# Altium PCB PCB.PcbDoc
Units mm, origin at the board's own origin, x right, y up, seen from the top; angles counter-clockwise.
Board outline 19.56 x 31 mm, 2 copper layers (Top Layer, Bottom Layer); 20 components, 8 nets, 40 pads, 0 vias.
Unrouted connection lines stored in the file: 1.
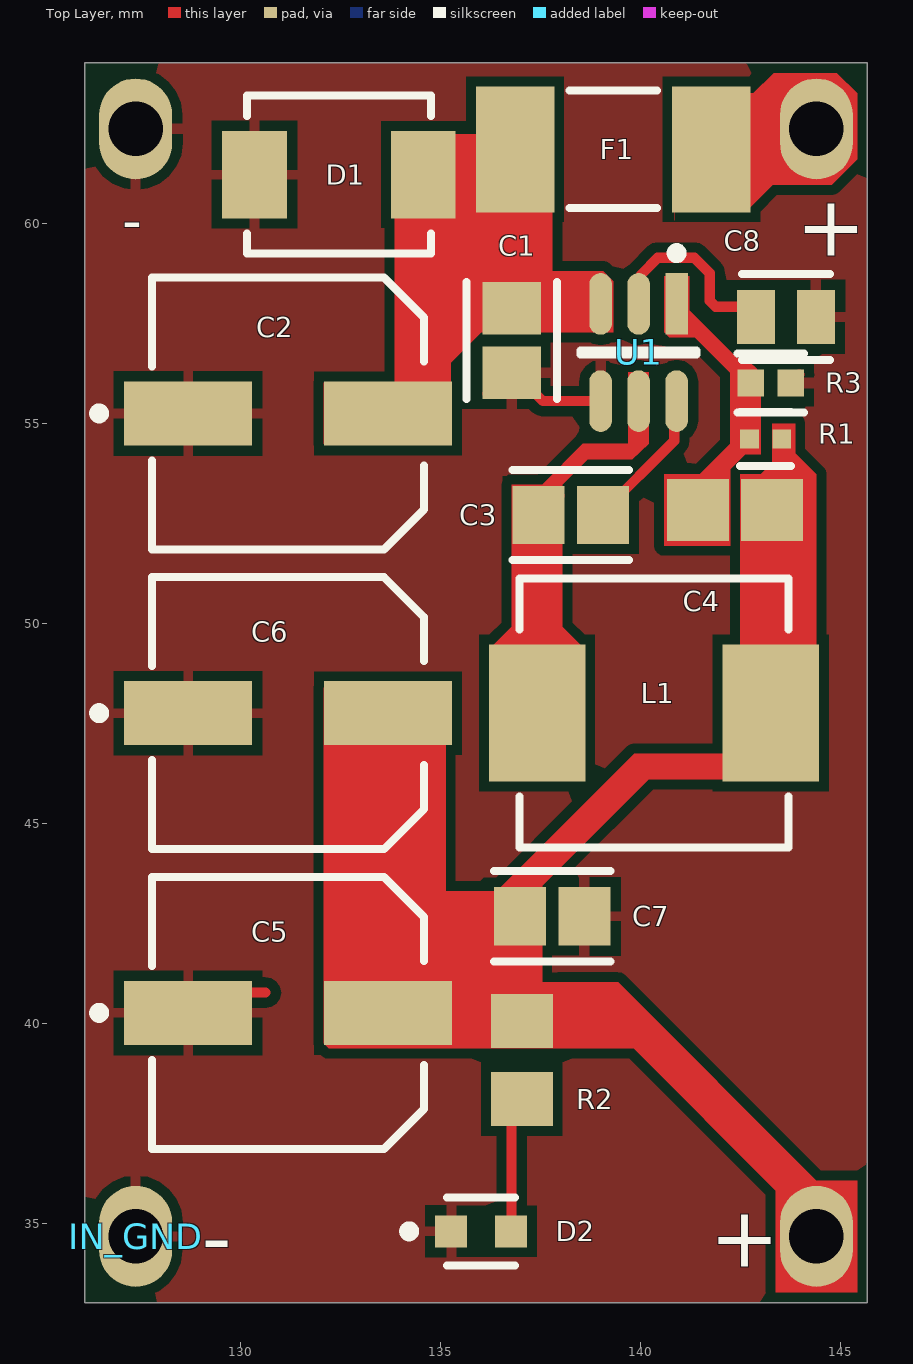
[diagram p0: Top Layer view]
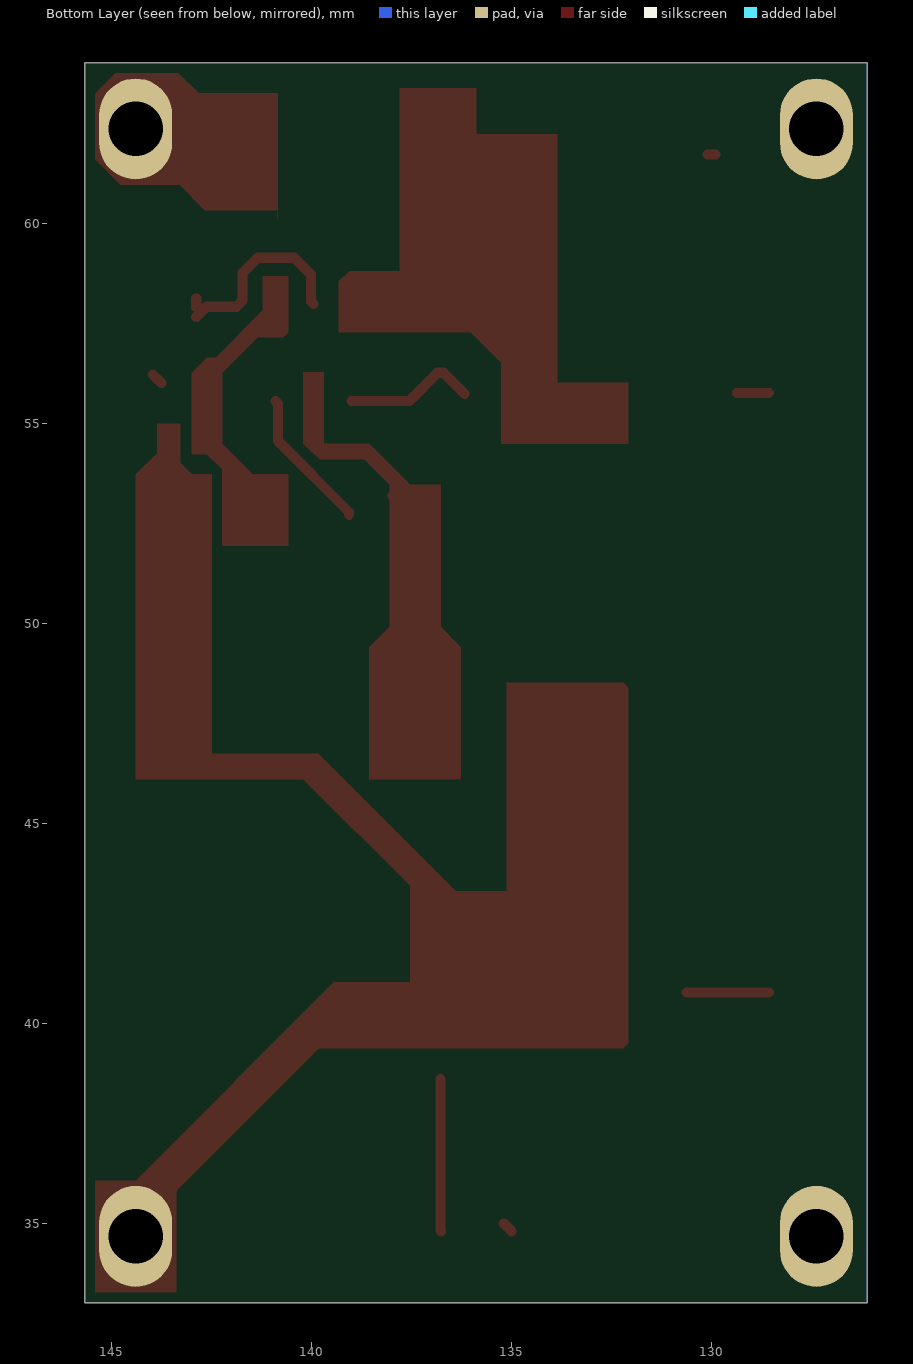
[diagram p1: Bottom Layer view, seen from below]
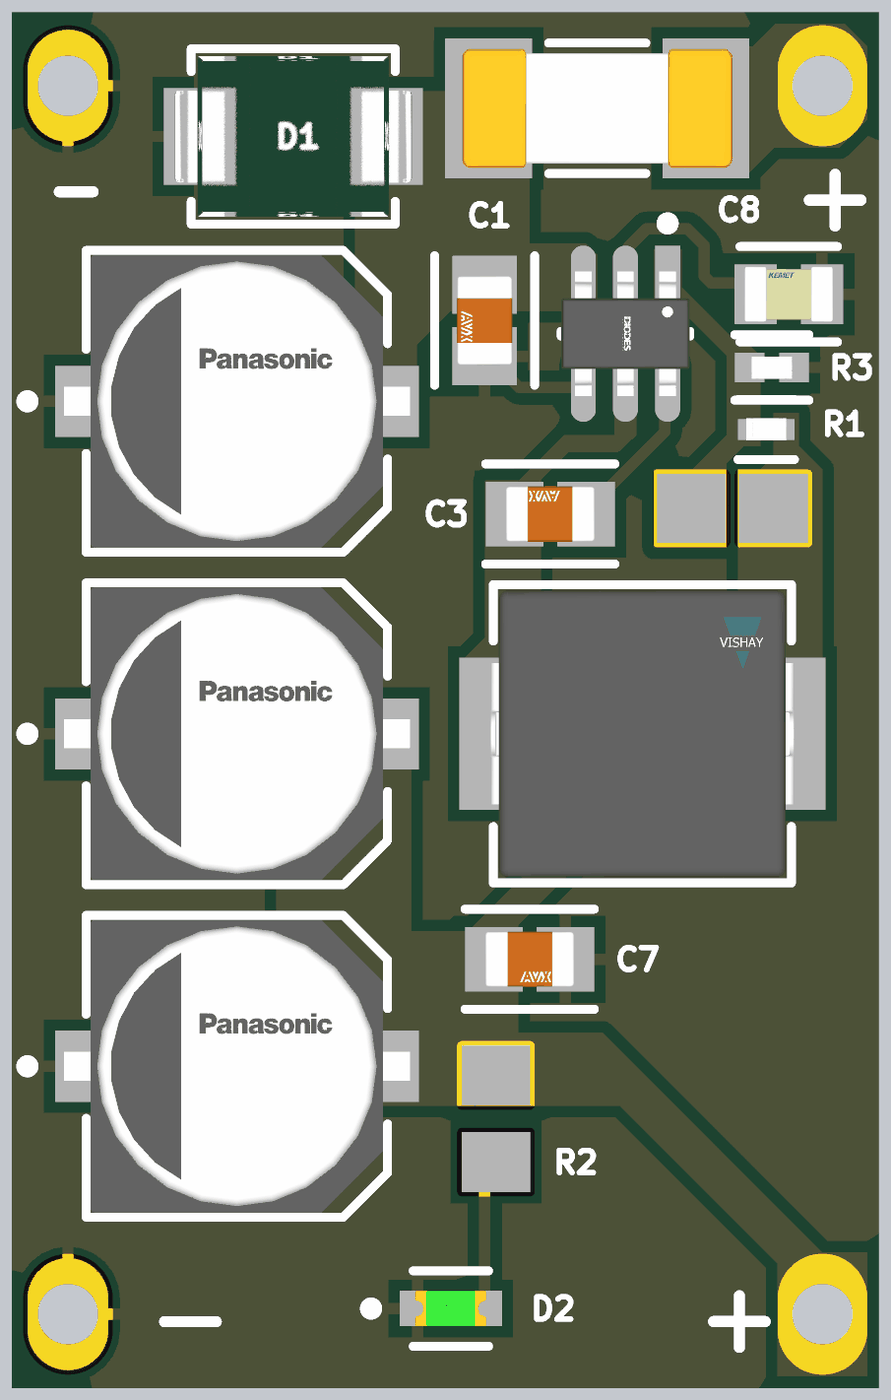
[diagram p2: 3D render of the assembled board from above, using the file's embedded part models]

## Layer stack, top to bottom
Top Solder: solder mask 0.0102, Solder Resist, Dk 3.5
Top Layer: signal copper 0.0356
Dielectric 1: dielectric 0.32, FR-4, Dk 4.8
Bottom Layer: signal copper 0.0356
Bottom Solder: solder mask 0.0102, Solder Resist, Dk 3.5

## Board outline
126.111,33.008 126.111,64.008 145.669,64.008 145.669,33.008

## Design rules (kind name [scope] priority, off if disabled: settings)
Clearance [All] p1: gap=0.254 ignorepadtopadclearanceinfootprint=FALSE
PolygonConnect PolygonConnect_5 [All vs IsNamedPolygon('GND_L01_P008')] p1: connectstyle=Direct reliefconductorwidth=0.254 reliefentries=4 polygonreliefangle="90 Angle" airgapwidth=0.254
PolygonConnect PolygonConnect_4 [All vs IsNamedPolygon('GND_L01_P005')] p2: connectstyle=Direct reliefconductorwidth=0.254 reliefentries=4 polygonreliefangle="90 Angle" airgapwidth=0.254
PolygonConnect PolygonConnect_3 [All vs IsNamedPolygon('NONET_L01_P004')] p3: thpad.connectstyle=Direct thpad.reliefconductorwidth=0.254 thpad.reliefentries=4 thpad.polygonreliefangle="90 Angle" thpad.airgapwidth=0.254 smdpad.connectstyle=Direct smdpad.reliefconductorwidth=0.254 smdpad.reliefentries=4 smdpad.polygonreliefangle="90 Angle" smdpad.airgapwidth=0.254 via.connectstyle=Relief via.reliefconductorwidth=0.254 via.reliefentries=4 via.polygonreliefangle="90 Angle" via.airgapwidth=0.254
PolygonConnect PolygonConnect_2 [All vs IsNamedPolygon('NONET_L01_P000')] p4: thpad.connectstyle=Direct thpad.reliefconductorwidth=0.254 thpad.reliefentries=4 thpad.polygonreliefangle="90 Angle" thpad.airgapwidth=0.254 smdpad.connectstyle=Direct smdpad.reliefconductorwidth=0.254 smdpad.reliefentries=4 smdpad.polygonreliefangle="90 Angle" smdpad.airgapwidth=0.254 via.connectstyle=Relief via.reliefconductorwidth=0.254 via.reliefentries=4 via.polygonreliefangle="90 Angle" via.airgapwidth=0.254
PolygonConnect PolygonConnect_1 [All vs IsNamedPolygon('NONET_L01_P000')] p5: thpad.connectstyle=Direct thpad.reliefconductorwidth=0.254 thpad.reliefentries=4 thpad.polygonreliefangle="90 Angle" thpad.airgapwidth=0.254 smdpad.connectstyle=Direct smdpad.reliefconductorwidth=0.254 smdpad.reliefentries=4 smdpad.polygonreliefangle="90 Angle" smdpad.airgapwidth=0.254 via.connectstyle=Relief via.reliefconductorwidth=0.254 via.reliefentries=4 via.polygonreliefangle="90 Angle" via.airgapwidth=0.254
PolygonConnect [All] p6: connectstyle=Relief reliefconductorwidth=0.254 reliefentries=4 polygonreliefangle="90 Angle" airgapwidth=0.254
RoutingVias [All] p1: holewidth=0.711 width=1.27 viastyle="Through Hole" minholewidth=0.711 minwidth=1.27 maxholewidth=0.711 maxwidth=1.27
SolderMaskExpansion [All] p1: expansion=0.102 istentingtop=FALSE
SupplyNets "Schematic Supply Nets_1" [InNet('GND')] p1: voltage=0.000
SupplyNets "Schematic Supply Nets" [InNet('VOUT')] p2: voltage=0.000
Width [All] p1: maxlimit=0.254 minlimit=0.254 preferedwidth=0.254
30 further rules are at their usual default settings.

## Components (designator, comment, footprint, x,y, rotation, side; value= is the part's Value field where it differs from the comment)
+ "CON 1 PIN" PCBComponent_1 144.399,34.671 r180 top (schematic designator OUT_VCC)
+ "CON 1 PIN" PCBComponent_1 144.399,62.357 r180 top (schematic designator IN_VCC)
- "CON 1 PIN" PCBComponent_1 127.381,62.357 r180 top (schematic designator OUT_GND)
C1 "100n" FP-0805-L_2_01_0_2-W_1_25-IPC_B 136.779,57.067 r270 top
C2 "10uF 50V" FP-FKD-MFG 131.191,55.245 r0 top
C3 "100n" FP-0805-L_2_01_0_2-W_1_25-IPC_B 138.259,52.705 r180 top
C4 "56pF" CAPC2013X94X50ML20T25 142.367,52.832 r0 top
C5 "22uF" FP-FKD-MFG 131.191,40.259 r0 top
C6 "22uF" FP-FKD-MFG 131.191,47.752 r0 top
C7 "100n" FP-0805-L_2_01_0_2-W_1_25-IPC_B 137.795,42.672 r0 top
C8 "22nF" FP-C0805C-DN-MFG 143.637,57.658 r0 top value="22,000 pF"
D1 "SMBJ33CA-TR" FP-SMB-CA-MFG 132.461,61.214 r0 top
D2 "LED" FP-LTST-C190GKT-MFG 136.017,34.798 r0 top
F1 "1A" FP-0451-MFG 139.319,61.849 r180 top value=0.078Ω
IN_GND "CON 1 PIN" PCBComponent_1 127.381,34.671 r180 top
L1 "6.8uH" FP-IHLP-2525CZ-FP_2_413x3-MFG 140.335,47.752 r0 top
R1 "158k" FP-CRCW0402-e3-IPC_C 143.129,54.61 r0 top
R2 "1k" RESC2013X70X40ML20T20 137.033,39.075 r90 top
R3 "30.1k" FP-CRCW0402-e3-IPC_A 143.256,56.007 r180 top
U1 "AP63300WU-7" FP-TSOT26-IPC_A 139.954,56.769 r270 top

## Footprints (in the part's own frame and the unit in brackets; to place one, negate y for a bottom-side part, rotate by r counter-clockwise, add the part's x,y. Pads: shape width x height; smd on the part's side, far side on the other; paste and mask are expansions set on the pad)
CAPC2013X94X50ML20T25 [mm] "Chip Capacitor, 2-Leads, Body 2.01x1.25mm, IPC Low Density"
  rect 1.55x1.55 smd: 1(-0.925,0) 2(0.925,0)
  body extent -1.1,-0.72 1.11,0.72, height 0.94
FP-0451-MFG [mil]
  rect 77x124 smd paste+0 mask+0: 1(-96.5,0) 2(96.5,0)
  silkscreen extent -43,-58 43,58, body extent -139,-66 139,66, height 10
FP-0805-L_2_01_0_2-W_1_25-IPC_B [mm]
  rect 1.305x1.456 smd paste+0 mask+0: 1(-0.806,0) 2(0.806,0)
  silkscreen extent -1.46,-1.13 1.46,1.13, body extent -1.71,-0.98 1.71,0.98, height 0.25
FP-C0805C-DN-MFG [mm]
  rect 0.95x1.35 smd paste+0 mask+0: 1(-0.75,0) 2(0.75,0)
  silkscreen extent -1.1,-1.07 1.1,1.07, body extent -1.4,-0.85 1.4,0.85, height 0.25
FP-CRCW0402-e3-IPC_A [mm]
  rect 0.668x0.672 smd paste+0 mask+0: 1(-0.502,0) 2(0.502,0)
  silkscreen extent -0.84,-0.74 0.84,0.74, body extent -1.04,-0.54 1.04,0.54, height 0.25
FP-CRCW0402-e3-IPC_C [mm]
  rect 0.468x0.472 smd paste+0 mask+0: 1(-0.402,0) 2(0.402,0)
  silkscreen extent -0.64,-0.67 0.64,0.67, body extent -0.74,-0.38 0.74,0.38, height 0.25
FP-FKD-MFG [mm]
  rect 3.2x1.6 smd paste+0 mask+0: 1(-2.5,0) 2(2.5,0)
  silkscreen extent -4.85,-3.4 3.4,3.4, body extent -4.35,-3.65 4.35,3.65, height 0.25
FP-IHLP-2525CZ-FP_2_413x3-MFG [mil]
  rect 95x135 smd paste+0 mask+0: 1(-115,0) 2(115,0)
  silkscreen extent -132,-132 132,132, body extent -166,-136 166,136, height 10
FP-LTST-C190GKT-MFG [mm]
  rect 0.8x0.8 smd paste+0 mask+0: 1(-0.75,0) 2(0.75,0)
  silkscreen extent -1.92,-0.85 0.85,0.85, body extent -1.25,-0.55 1.25,0.55, height 0.25
FP-SMB-CA-MFG [mm]
  rect 1.62x2.18 smd paste+0 mask+0: 1(-2.11,0) 2(2.11,0)
  silkscreen extent -2.3,-1.97 2.3,1.97, body extent -3.02,-2.07 3.02,2.07, height 0.25
FP-TSOT26-IPC_A [mm]
  rect 1.54x0.566 smd paste+0 mask+0: 1(-1.216,0.95)
  rrect100% 1.54x0.566 smd paste+0 mask+0: 2(-1.216,0) 3(-1.216,-0.95) 4(1.216,-0.95) 5(1.216,0) 6(1.216,0.95)
  silkscreen extent -2.61,-1.45 0.05,1.45, body extent -2.49,-1.95 2.49,1.95, height 0.25
PCBComponent_1 [mm]
  oval 1.824x2.524 hole 1.362: 1(0,0)
RESC2013X70X40ML20T20 [mm] "Chip Resistor, 2-Leads, Body 2.00x1.25mm, IPC Low Density"
  rect 1.35x1.55 smd: 1(-0.975,0) 2(0.975,0)
  body extent -1.1,-0.72 1.1,0.72, height 0.7

## Part data
+ + - IN_GND: library part Connector_3mm
C1 C3 C7: library part CMP-2007-04172-2, "Automotive Ceramic Capacitor, 0805, 100nF, 10%, X7R, 15%, 100V", Capacitance=100nF, Case Code (Imperial)=0805, Case Code (Metric)=2012, Dielectric=X7R, Dielectric Material=Ceramic, Max Operating Temperature=125°C, Min Operating Temperature=-55°C, Package Quantity=1, Ratings=AEC-Q200, Tolerance=10%, Voltage=100V, Case/Package=0805, Construction=Flat, Depth=1.25mm, Height=1.4mm, Lead Free="Lead Free", Length=2.01mm, Mount="Surface Mount", Number of Pins=2, Packaging="Tape and Reel", Radiation Hardening=No, REACH SVHC="No SVHC", RoHS Compliant=Yes, Series=-, Termination=SMD/SMT, Thickness=0.055inch, Voltage Rating=100V, Voltage Rating (DC)=100V, Width=0.049inch
C2: library part CMP-2000-06207-2, "CAP ALUM 10UF 20% 50V SMD", Capacitance=10uF, Case/Package=Radial, ESR (Equivalent Series Resistance)=880mR, Leakage Current=3uA, Max Operating Temperature=105°C, Min Operating Temperature=-55°C, Package Quantity=1000, Ripple Current=165mA, Tolerance=20%, Voltage=50V, Construction=Cylindrical, Contact Plating=Tin, Diameter=6.3mm, Height=5.8mm, Height - Seated (Max)=0.24inch, Impedance=880mR, Lead Diameter=0.65mm, Lead Free="Lead Free", Lead Pitch=1.8mm, Length=5.8mm, Life (Hours)=2000Hour, Mount="Surface Mount", Number of Pins=2, Packaging="Tape and Reel", Polarity=Polar, Radiation Hardening=No, REACH SVHC="No SVHC", Ripple Current (AC)=165mA, RoHS Compliant=Yes, Series=FK, Size=5.8mm, Termination=SMD/SMT, Voltage Rating=50V, Voltage Rating (DC)=50V, Width=7.8mm
C4: library part CMP-2007-04332-1, Manufacturer="AVX Interconnect / Elco", Part Number=08055A560JAT2-A
C5 C6: library part CMP-2000-06209-2, "CAP ALUM 22UF 20% 50V SMD", Case/Package=Radial, Dielectric Material=Aluminium, ESR (Equivalent Series Resistance)=880mR, Leakage Current=3uA, Max Operating Temperature=105°C, Min Operating Temperature=-55°C, Package Quantity=1000, Ripple Current=165mA, Tolerance=20%, Voltage=50V, Capacitance=22uF, Construction=Cylindrical, Contact Plating=Tin, Diameter=6.3mm, Height=5.8mm, Height - Seated (Max)=0.24inch, Impedance=880mR, Lead Free="Lead Free", Length=5.8mm, Life (Hours)=2000Hour, Mount="Surface Mount", Number of Pins=2, Packaging="Tape and Reel", Polarity=Polar, Radiation Hardening=No, REACH SVHC="No SVHC", Ripple Current (AC)=165mA, RoHS Compliant=Yes, Series=FK, Termination=SMD/SMT, Voltage Rating=50V, Voltage Rating (DC)=50V, Width=7.8mm
C8: library part CMP-2007-00338-2, "CAP CER 0.022UF 50V X7R 0805", Capacitance="22,000 pF", Manufacturer=KEMET, Manufacturer Part Number=C0805C223K5RACTU, Package=C0805C-DN, Temperature="-55°C to +125°C", Temperature Characteristic=X7R, Temperature Coefficient=30ppm/°C, Temperature Range High=+125°C, Temperature Range Low=-55°C, Tolerance=0.1, Voltage Rating="50 V", Automotive=No, Category=Cap, ComponentLink2Description=Datasheet, ComponentLink2URL=https://content.kemet.com/datasheets/KEM_C1003_C0G_SMD.pdf, Device Class L1="Passive Components", Device Class L2=Capacitors, Device Class L3="Ceramic Capacitors", Digikey Description="CAP CER 0.022UF 50V X7R 0805", Height=0.88mm, Ipc Land Pattern Name=CAPC200125X78, Lead Free=Yes, Material=Ceramic, Mouser Description="Capacitor; Ceramic; Cap; .022uF; Tol 10%; SMT; Vol-Rtg 50V; X7R; Tape and Reel", Octopart=https://octopart.com/c0805c223k5ractu-kemet-145968, RoHS=TRUE
D1: library part CMP-12225-000040-1, "TVS DIODE 33V 69.7V SMB", Breakdown Voltage=36.7V, Clamping Voltage=53.3V, Manufacturer=STMicroelectronics, Max Junction Temp=+150°C, Package=SMB-CA, Peak Pulse Current=11.8A, Peak Pulse Power=600W, Reverse Standoff Voltage=33V, Temperature="-55°C to +150°C", Temperature Range Low=-55°C, Automotive=No, Category=Diode, ComponentLink2Description=Datasheet, ComponentLink2URL=https://www.st.com/resource/en/datasheet/smbj.pdf, Device Class L1="Circuit Protection", Device Class L2="TVS Diodes", Device Class L3=unset, Digikey Description="TVS DIODE 33V 69.7V SMB", Direction=Bidirectional, Height=2.65mm, Lead Free=Yes, Manufacturer Part Number=SMBJ33CA-TR, Mouser Description="TVS Diodes - Transient Voltage Suppressors 600W 33V Bidirect", Number Of Channels=1, Octopart=https://octopart.com/smbj33ca-tr-stmicroelectronics-347069, RoHS=TRUE, Standoff Height=0.05mm, Temperature Range High=+150°C
D2: library part CMP-22017-000005-2, "LED GREEN CLEAR CHIP SMD", Case Code (Imperial)=0603, Case Code (Metric)=1608, Color=Green, Forward Current=30mA, Forward Voltage=2.1V, Lens Color=Colorless, Max Operating Temperature=85°C, Min Operating Temperature=-55°C, Package Quantity=1, Power Dissipation=100mW, Reverse Voltage=5V, Test Current=10mA, Voltage=2V, Case/Package=0603, Depth=0.8mm, Dominant Wavelength=569nm, Height=0.8mm, Illumination Color=Green, Lead Free="Lead Free", Length=1.6mm, Lens Style=Clear, Lens Transparency=Clear, Luminous Intensity=6mcd, Mount="Surface Mount", Number of Elements=1, Number of LEDs=1, Number of Pins=2, Packaging="Tape and Reel", Power Rating=100mW, Radiation Hardening=No, Viewing Angle=130°, Wavelength=565nm, Width=0.8mm
F1: library part CMP-08605-000061-1, "FUSE BRD MNT 1A 125VAC/VDC 2SMD", Fuse Interrupt Ac Current=50A, Fuse Interrupt Dc Current=300A, Manufacturer="Littelfuse Inc", Manufacturer Part Number=0451001.MRL, Max Fuse Ac Voltage=125V, Package=0451, Resistance=0.078Ω, Temperature="-55°C to +125°C", Temperature Range High=+125°C, Temperature Range Low=-55°C, Automotive=No, Category=Fuse, ComponentLink2Description=Datasheet, ComponentLink2URL=https://www.littelfuse.com/~/media/electronics/datasheets/fuses/littelfuse_fuse_451_453_datasheet.pdf.pdf, Device Class L1="Circuit Protection", Device Class L2=Fuses, Device Class L3=unset, Digikey Description="FUSE BRD MNT 1A 125VAC/VDC 2SMD", Fuse Blow Speed=Fast, Fuse Current=1A, Fuse I2T=0.6029A2Sec, Height=2.94mm, Lead Free=Yes, Max Fuse Dc Voltage=125V, Mouser Description="Surface Mount Fuses 125V 1A", Octopart=https://octopart.com/0451001.mrl-littelfuse-566368, RoHS=TRUE, Voltage Rating=125V
L1: library part CMP-02424-000659-1, "Commercial Inductors, Low DCR Series 6.8uH 5.5A 46.8mΩ 20%", Case Code (Imperial)=2525, Case Code (Metric)=6363, Current Rating=5.5A, DC Resistance (DCR)=46.8mR, Inductance Tolerance=20%, Max DC Current=4A, Max Operating Temperature=125°C, Min Operating Temperature=-55°C, Package Quantity=2000, Self Resonant Frequency=1MHz, Test Frequency=100kHz, Case/Package=2525, Contact Plating=Tin, Core Material=Ferrite, Depth=6.72mm, Height=3mm, Height - Seated (Max)=0.118inch, Inductance=6.8uH, Lead Free="Lead Free", Length=7.24mm, Military Standard=Not, Mount="Surface Mount", Number of Pins=2, Packaging="Tape and Reel", Radiation Hardening=No, RMS Current (Irms)=5.5A, Saturation Current=4A, Shielding=Shielded, Termination=SMD/SMT, Tolerance=20%, Width=0.255inch
R1: library part CMP-2002-08218-2, "RES Thick Film, 158kΩ, 1%, 0.063W, 100ppm/°C, 0402", Case Code (Imperial)=0402, Case Code (Metric)=1005, Max Operating Temperature=155°C, Max Power Dissipation=63mW, Min Operating Temperature=-55°C, Package Quantity=10, Resistance=158kR, Temperature Coefficient=100ppm/°C, Tolerance=1%, Voltage Rating=50V, Case/Package=0402, Composition="Thick Film", Contact Plating=Tin, Depth=0.5mm, Features="Automotive AEC-Q200", Height=0.016inch, Lead Free="Lead Free", Length=1mm, Military Standard=Not, Number of Pins=2, Number of Terminations=2, Packaging="Tape and Reel", Power Rating=63mW, Radiation Hardening=No, Termination=SMD/SMT, Voltage Rating (DC)=50V, Weight=2.3E-05oz, Width=0.5mm
R2: library part CMP-2001-04375-5, "Chip Resistor, 1 KOhm, +/- 1%, 0.125 W, -55 to 155 degC, 0805 (2012 Metric), RoHS, Tape and Reel", Manufacturer=Panasonic, Max Operating Temperature="155 degC", Min Operating Temperature="-55 degC", Package Quantity=1, Voltage Rating="150 V", ComponentLink1Description="Manufacturer URL", ComponentLink1URL=http://www.panasonic.com/, ComponentLink2Description=Datasheet, ComponentLink2URL=http://industrial.panasonic.com/cdbs/www-data/pdf/RDA0000/AOA0000C86.pdf, DatasheetVersion=04/2015, Height="0.6 mm", Length="2 mm", Mount="Surface Mount", Mounting Technology="Surface Mount", PackageDescription="2-Pin Surface Mount Device, Body 2 x 1.25 mm", PackageReference=0805, Packaging="Cut Tape", REACH SVHC=Yes, RoHSCompliant=true
R3: library part CMP-2002-08506-4, "RES Thick Film, 30.1kΩ, 1%, 0.063W, 100ppm/°C, 0402", Case Code (Imperial)=0402, Case Code (Metric)=1005, Max Operating Temperature=155°C, Max Power Dissipation=63mW, Min Operating Temperature=-55°C, Package Quantity=10, Resistance=30.1kR, Temperature Coefficient=100ppm/°C, Tolerance=1%, Voltage Rating=50V, Case/Package=0402, Composition="Thick Film", Contact Plating=Tin, Depth=0.5mm, Features="Automotive AEC-Q200", Height=0.35mm, Lead Free="Lead Free", Length=1mm, Military Standard=Not, Mount="Surface Mount", Number of Pins=2, Number of Terminations=2, Packaging="Tape and Reel", Power Rating=63mW, Radiation Hardening=No, Termination=SMD/SMT, Voltage Rating (DC)=50V, Weight=2.3E-05oz, Width=0.02inch
U1: library part CMP-12757-000025-1, "DCDC CONV HV BUCK TSOT26"

## Nets (pads, with @x,y where several pads share a name; then routed paths per layer and width w, separated by ;. In a path a pad name is that pad's centre, name@x,y a point inside that pad or via, vN(x,y) a via of type N, cw(c..) or ccw(c..) an arc to the next point about the centre after c; other vN are vias at no path point)
BST: C3.1 U1.6 | length 3.6
  Top Layer w0.254: C3.1 139.065,52.781 140.844,54.56 140.844,55.494 U1.6
EN: C8.1 U1.2 | length 5
  Top Layer w0.254: U1.2 140.014,58.044 140.014,58.716 140.433,59.135 141.345,59.135 141.732,58.748 141.732,58.061 141.881,57.912 142.633,57.912 C8.1 ; C8.1@142.887,57.912 C8.1@142.887,58.112
FB: C4.1 R1.1 R3.2 U1.1 | length 1.4
  Top Layer w0.254: U1.1 U1.1@140.904,58.239 ; C4.1 C4.1@142.09,53.48 ; R3.2@142.581,56.18 R3.2 ; R1.1@142.727,54.608 R1.1 ; 142.727,54.864 142.74,54.878
GND: -.1 C1.2 C2.1 C5.1 C6.1 C7.2 C8.2 D1.1 D2.1 IN_GND.1 R3.1 U1.4 | length 7
  Top Layer w0.254: C5.1@128.564,40.767 130.625,40.767 ; C2.1@128.564,55.753 C2.1@129.364,55.753 ; D1.1@129.907,61.722 D1.1@130.097,61.722 ; D2.1@135.002,34.798 D2.1@135.2,34.996 ; C1.2@136.178,55.736 136.703,56.261 C1.2 136.855,56.261 137.562,55.553 U1.4 ; R3.1 143.758,56.009 143.965,56.216 R3.1@143.967,56.216
NetD2_2: D2.2 R2.1 | length 3.8
  Top Layer w0.254: D2.2 136.779,34.81 R2.1@136.779,38.608
SW: C3.2 L1.1 U1.5 | length 1.7
  Top Layer w0.254: L1.1@137.16,48.26 L1.1@137.243,48.343 ; C3.2@137.497,52.705 C3.2@137.979,53.187 ; U1.5@139.954,55.067 U1.5 U1.5@139.954,55.934
VIN: +.1@144.399,62.357 C1.1 C2.2 D1.2 F1.1 F1.2 U1.3
VOUT: +.1@144.399,34.671 C4.2 C5.2 C6.2 C7.1 L1.2 R1.2 R2.2 | length 2.5
  Top Layer w0.254: C7.1@136.735,43.142 C7.1@136.735,43.218 ; L1.2@143.002,47.752 143.002,48.26 L1.2@143.038,48.296 ; C4.2 143.531,53.071 R1.2

## Polygon pours and split planes (outlines as drawn)
GND on Bottom Layer "GND_L02_P006" (solid, pour order 6): 126.111,33.008 126.111,64.008 145.669,64.008 145.669,33.008
GND on Top Layer "GND_L01_P008" (solid, pour order 8): 126.111,33.008 126.111,64.008 145.669,64.008 145.669,33.008

## Other copper
Top Layer:
  region net VOUT: 143.288,54.007 143.002,53.721 142.494,53.721 142.494,46.228 142.621,46.101 144.399,46.101 144.399,53.721 143.865,54.255 143.865,54.985 143.288,54.985
  region net VOUT: 139.839,46.736 136.404,43.301 135.128,43.307 135.128,48.514 132.207,48.514 132.08,48.387 132.08,39.497 132.207,39.37 137.922,39.37 137.922,41.021 137.541,41.021 137.541,43.434 140.208,46.101 144.399,46.101 144.399,46.736
  region net FB: 140.589,58.674 140.589,57.277 140.716,57.15 141.351,57.15 142.24,56.261 142.24,54.483 141.478,53.721 140.589,53.721 140.589,51.943 142.24,51.943 142.24,53.848 142.621,54.229 143.002,54.229 143.002,56.261 142.621,56.642 142.403,56.642 141.224,57.821 141.224,58.547 141.224,58.674
  region net SW: 139.7,56.269 140.208,56.269 140.208,54.483 139.795,54.102 138.684,54.102 138.259,53.677 138.049,53.467 138.049,49.911 138.557,49.403 138.557,46.101 136.271,46.101 136.271,49.403 136.779,49.911 136.779,53.467 137.541,53.467 138.557,54.483 139.7,54.483
  region net VIN: 133.858,62.23 135.89,62.23 135.89,63.373 137.795,63.373 137.795,58.801 139.065,58.801 139.319,58.547 139.319,57.277 136.017,57.277 135.255,56.515 135.255,54.483 132.08,54.483 132.08,56.007 133.858,56.007 133.858,62.23 135.382,62.23
  region net VIN: 142.669,60.325 143.304,60.96 144.78,60.96 145.415,61.595 145.415,63.246 144.907,63.754 143.332,63.754 142.824,63.246 140.843,63.246 140.843,60.071 140.843,63.246 140.843,60.325
  region net VOUT: 136.017,41.021 136.017,39.37 139.827,39.37 143.383,35.814 143.383,33.274 145.415,33.274 145.415,36.068 144.399,36.068 139.446,41.021

## Silkscreen, mask and mechanical layers (free items; w line width, h text height)
Top Overlay:
  text "-" at 129.032,33.909 h1.52
Mechanical 1:
  the board outline again, w0.254